# Altium PCB PCB1.PcbDoc
Units mm, origin at the board's own origin, x right, y up, seen from the top; angles counter-clockwise.
Board outline 30 x 30 mm, 2 copper layers (Top Layer, Bottom Layer), stack 1.571 mm thick; 12 components, 9 nets, 54 pads, 18 vias.
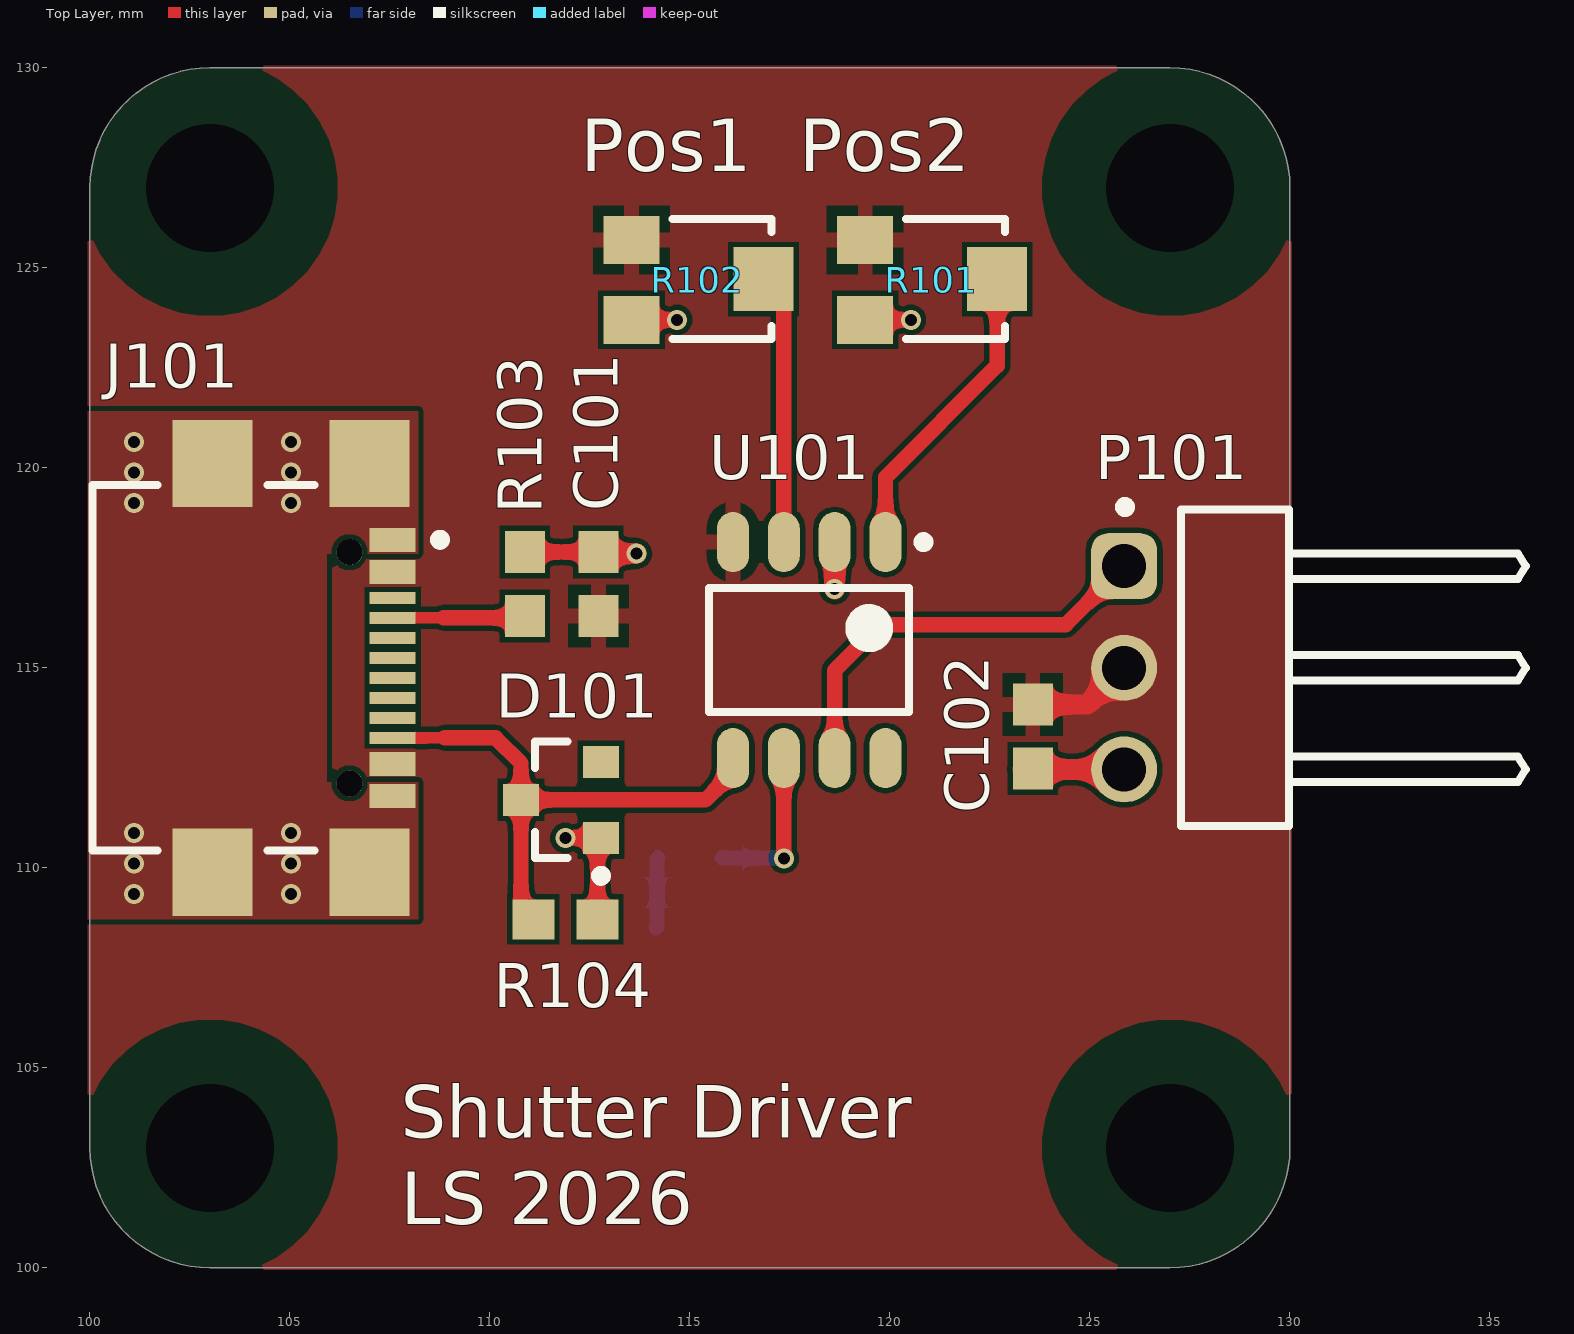
[diagram p0: Top Layer view]
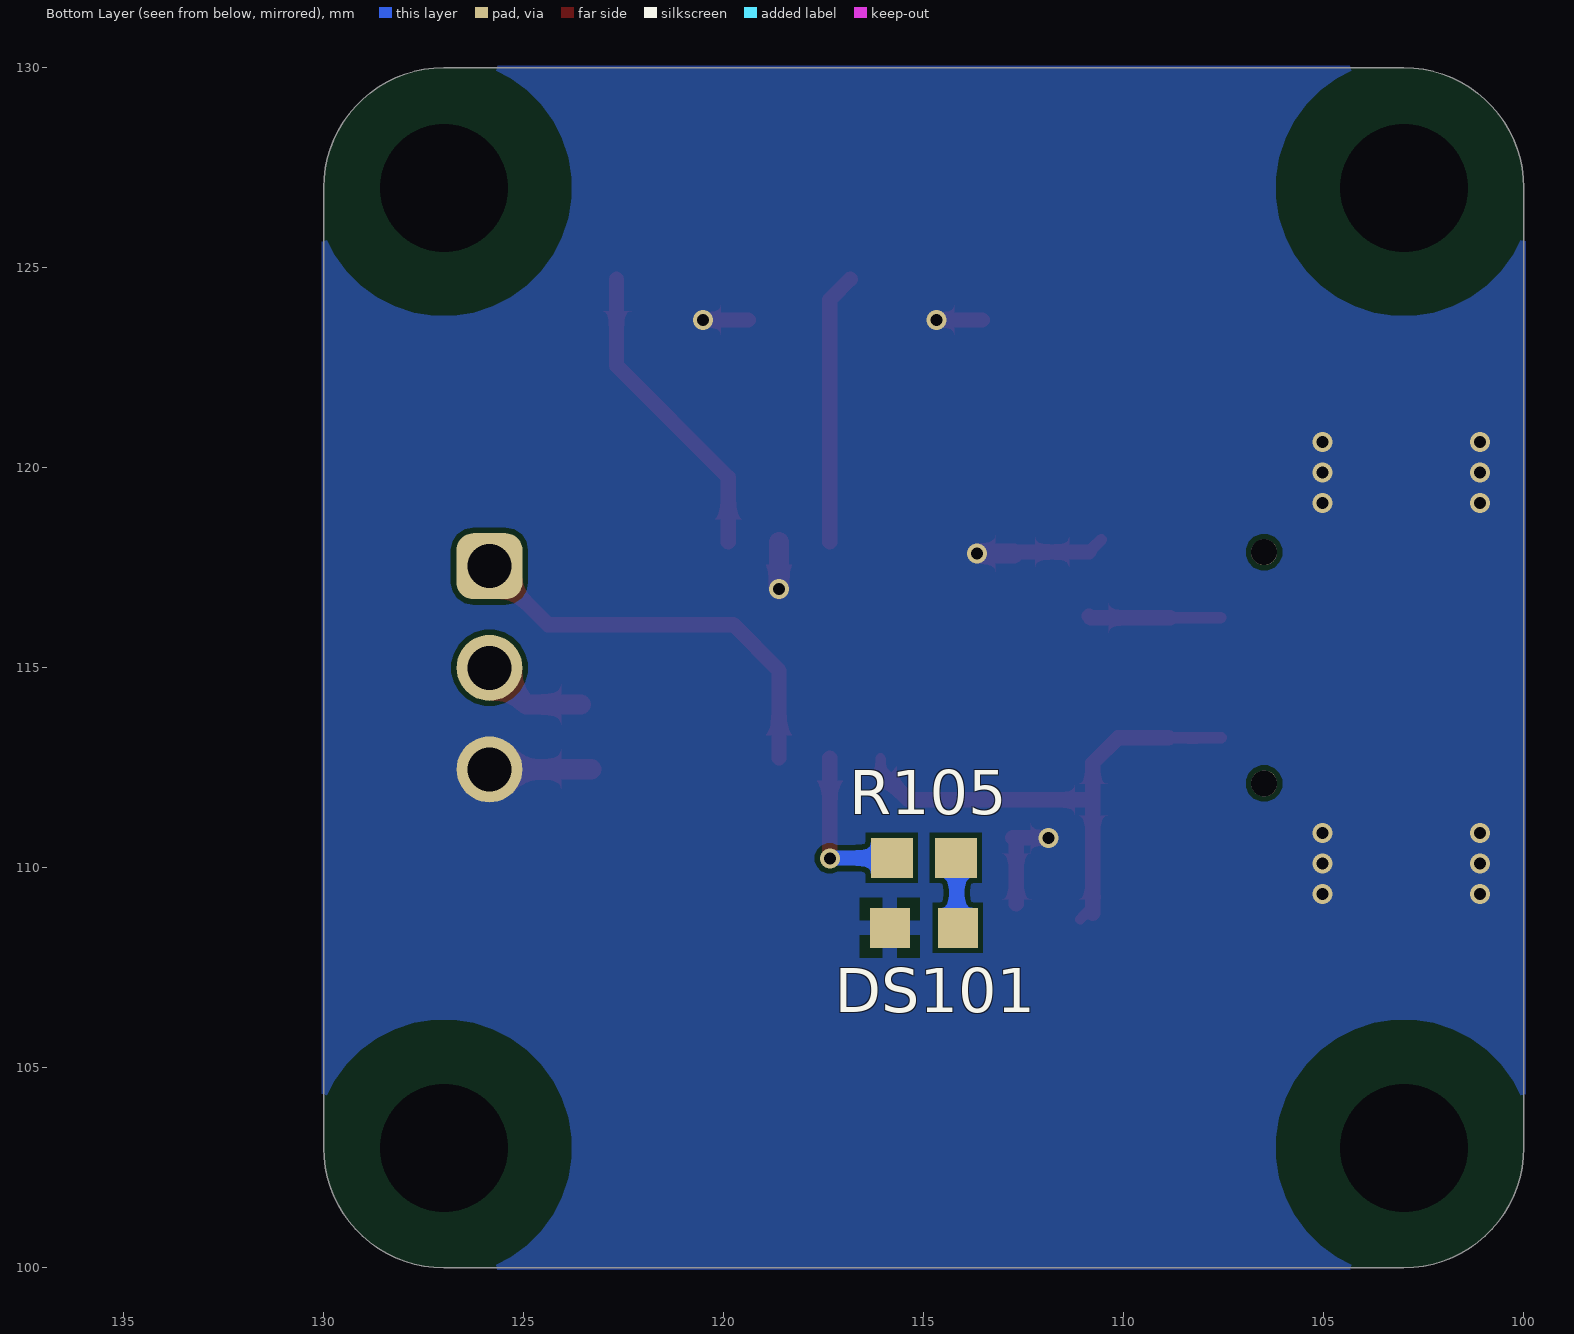
[diagram p1: Bottom Layer view, seen from below]
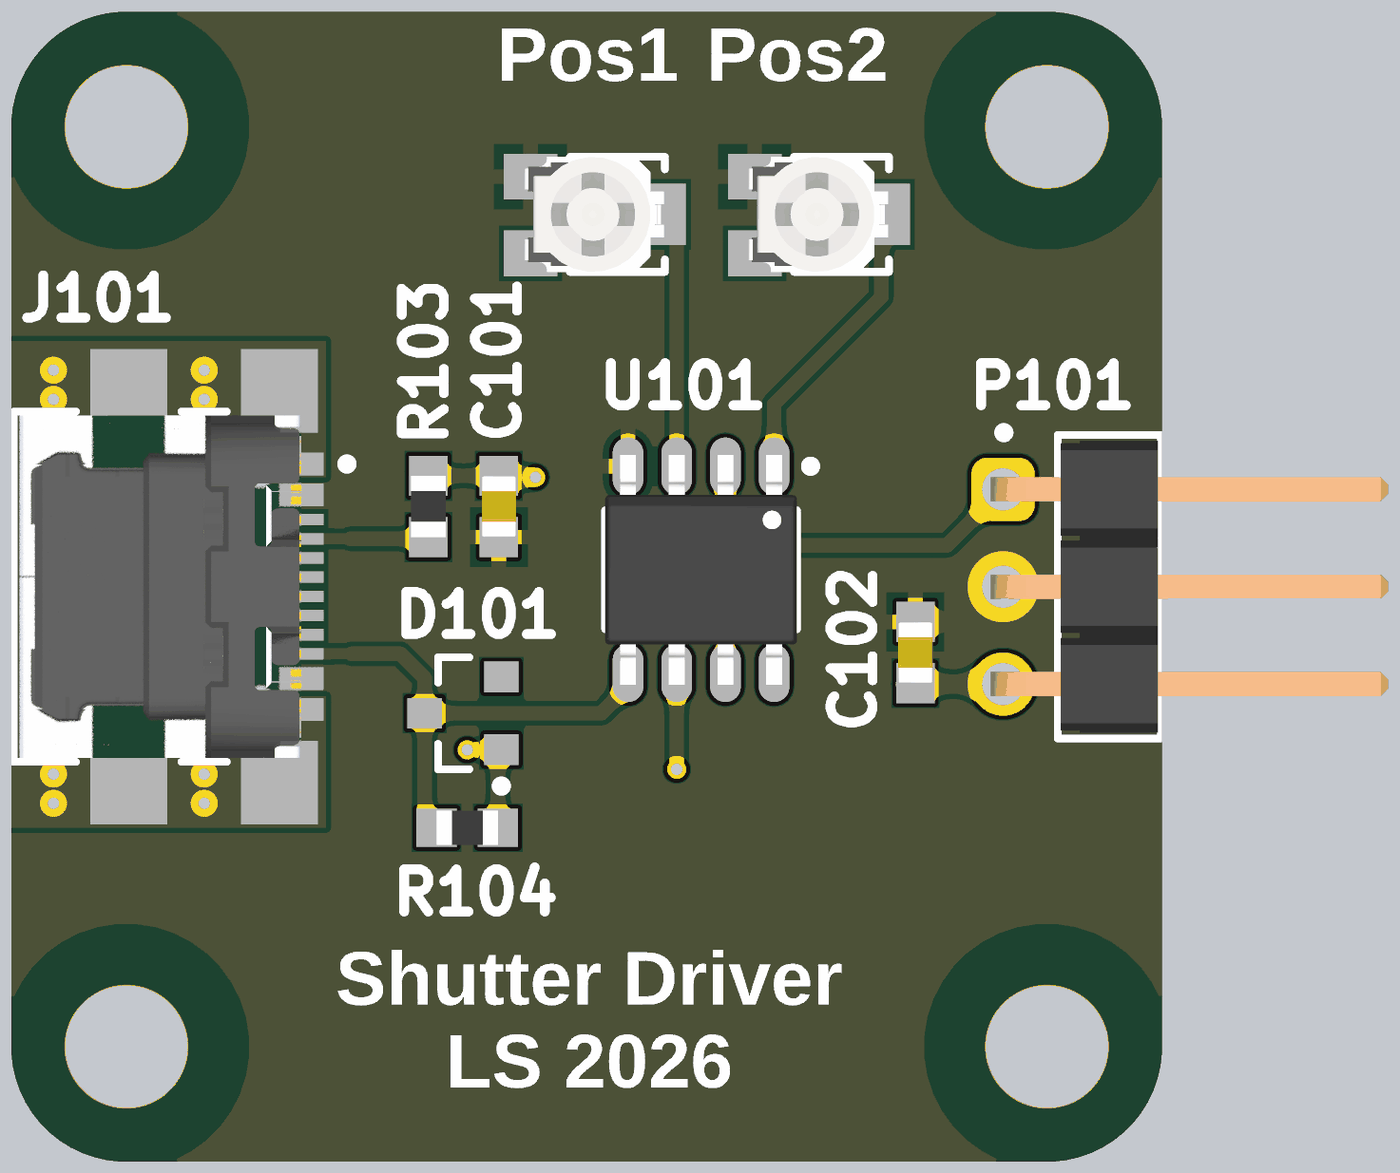
[diagram p2: 3D render of the assembled board from above, using the file's embedded part models]

## Layer stack, top to bottom
Top Solder: solder mask 0.0102, Solder Resist, Dk 3.5
Top Layer: signal copper 0.0356
Dielectric 1: dielectric 1.5, FR-4, Dk 4.8
Bottom Layer: signal copper 0.0356
Bottom Solder: solder mask 0.0102, Solder Resist, Dk 3.5

## Board outline
103,100 cw(c103,103) 100,103 100,127 cw(c103,127) 103,130 127,130 cw(c127,127) 130,127 130,103 cw(c127,103) 127,100

## Design rules (kind name [scope] priority, off if disabled: settings)
Clearance Clearance_MountingHole [All vs InUnion(2)] p1: gap=1.6 ignorepadtopadclearanceinfootprint=TRUE
Clearance [All] p2: gap=0.127 ignorepadtopadclearanceinfootprint=TRUE except(0.254: THPad-THPad THPad-Via Via-Via)
HoleSize [All] p1: absolutevalues=TRUE maxlimit=254 minlimit=0.025 maxpercent=80.000 minpercent=20.000
MinimumSolderMaskSliver [All] p1: minsoldermaskwidth=0.1
PolygonConnect PolygonConnect_Connectors [All vs InComponent('J101') or InComponent('P101') or IsVia] p1: connectstyle=Direct reliefconductorwidth=0.254 reliefentries=4 polygonreliefangle="90 Angle" airgapwidth=0.254
PolygonConnect [All] p2: connectstyle=Relief reliefconductorwidth=0.381 reliefentries=4 polygonreliefangle="90 Angle" airgapwidth=0.254
RoutingVias [All] p1: holewidth=0.3 width=0.5 viastyle="Through Hole" minholewidth=0.3 minwidth=0.5 maxholewidth=2539.975 maxwidth=2539.975
SilkToSilkClearance [All] p1: silktosilkclearance=0
SilkToSolderMaskClearance [IsPad] p1: minsilkscreentomaskgap=0.1 clearancetoexposedcopper=TRUE
SolderMaskExpansion SolderMaskExpansion_VIA [IsVia] p1: expansion=-100 istentingtop=FALSE
SolderMaskExpansion [All] p2: expansion=0.102 istentingtop=FALSE
SupplyNets "Schematic Supply Nets_1" [InNet('+5')] p1: voltage=0.000
SupplyNets "Schematic Supply Nets" [InNet('GND')] p2: voltage=0.000
Width [All] p1: maxlimit=254 minlimit=0.127 preferedwidth=0.254
26 further rules are at their usual default settings.

## Components (designator, comment, footprint, x,y, rotation, side; value= is the part's Value field where it differs from the comment)
C101 "Capacitor" CAPC1608X09N 112.712,117.094 r270 top value=1p
C102 "Capacitor" CAPC1608X09N 123.571,113.284 r90 top value=1p
D101 "BZX84C5V6LT1G" ONSC-SOT-23-3-318-08_V 111.776,111.699 r180 top
DS101 "KP-1608SECK" KING-0603LED_ORANGE_V 115,108.5 r180 bottom
J101 "USB4110-GF-A" FP-USB4110-GF-A-MFG 103.886,115 r270 top locked
P101 "61300311021" 61300311021 128.627,115 r90 top
R101 "Cermet Trimmer" CERMET_TRIMMER_SMD 121.031,124.714 r0 top
R102 "Cermet Trimmer" CERMET_TRIMMER_SMD 115.189,124.714 r0 top
R103 "5k1" RESC1608X06N 110.871,117.094 r270 top
R104 "5k1" RESC1608X06N 111.887,108.712 r180 top
R105 "1k" RESC1608X06N 115,110.25 r0 bottom
U101 "CH32V003J4M6" SOIC127P600X155-8N 117.983,115.443 r270 top

## Footprints (in the part's own frame and the unit in brackets; to place one, negate y for a bottom-side part, rotate by r counter-clockwise, add the part's x,y. Pads: shape width x height; smd on the part's side, far side on the other; paste and mask are expansions set on the pad)
61300311021 [mm] "Pin Header, pitch 2.54 mm, THT, Angled, single row, 3p"
  rrect50% 1.65x1.65 hole 1.1: 1(2.54,2.77)
  round 1.65 hole 1.1: 2(0,2.77) 3(-2.54,2.77)
  silkscreen extent -3.96,-7.27 4.14,2.87, body extent -3.81,-7.27 3.81,3.09, height 2.58
CAPC1608X09N [mm] "Chip Capacitor, 2-Leads, Body 1,55x0,85mm, IPC Medium Density"
  rect 1.05x1 smd: 1(-0.8,0) 2(0.8,0)
  body extent -0.8,-0.45 0.8,0.45, height 0.9
CERMET_TRIMMER_SMD [mm]
  rect 1.4x1.2 smd paste+0 mask+0: 1(-1.651,0.984) 3(-1.651,-1.016)
  rect 1.5x1.6 smd paste+0 mask+0: 2(1.65,0)
  silkscreen extent -0.63,-1.5 1.85,1.5, body extent -2.3,-1.7 2.5,1.7, height 0.25
FP-USB4110-GF-A-MFG [mm]
  rect 2.18x2 smd paste+0 mask+0: 1(-5.11,3.105) 2(5.11,3.105) 3(-5.11,-0.825) 4(5.11,-0.825)
  rect 0.6x1.15 smd paste+0 mask+0: A1-B12(-3.2,3.68) A4-B9(-2.4,3.68) B1-A12(3.2,3.68) B4-A9(2.4,3.68)
  rect 0.3x1.15 smd paste+0 mask+0: A5(-1.25,3.68) A6(-0.25,3.68) A7(0.25,3.68) A8(1.25,3.68) B5(1.75,3.68) B6(0.75,3.68) B7(-0.75,3.68) B8(-1.75,3.68)
  round 0.65 hole 0.65 unplated paste-2539.97 mask+0: ""(-2.89,2.605) ""(2.89,2.605)
  silkscreen extent -4.57,-3.83 4.57,4.99, body extent -6.3,-3.92 6.3,4.36, height 0.25
KING-0603LED_ORANGE_V [mm] "SMT LED, 2-Leads, Body 1.6x0.8mm (0603-Size)"
  rect 1x1 smd paste+0 mask+0: 1(0.85,0) 2(-0.85,0)
  body extent -0.92,-0.53 1.09,0.53, height 1.1
ONSC-SOT-23-3-318-08_V [mm] "SOT23, 3-Leads, Body 2.92x1.3mm, Pitch 0.95mm"
  rect 0.9x0.8 smd: 1(-1,0.95) 2(-1,-0.95) 3(1,0)
  silkscreen extent -1.13,-1.46 0.65,2.02, body extent -0.65,-1.46 0.65,1.46, height 1.11
RESC1608X06N [mm] "Chip Resistor, 2-Leads, Body 1,55x0,85mm, IPC Medium Density"
  rect 1.05x1 smd: 1(-0.8,0) 2(0.8,0)
  body extent -0.8,-0.45 0.8,0.45, height 0.6
SOIC127P600X155-8N [mm] "SOIC, 8-Leads, Body 5,00x3,90mm, Pitch 1,27mm, IPC Medium Density"
  oval 1.5x0.8 smd: 1(-2.7,1.905) 2(-2.7,0.635) 3(-2.7,-0.635) 4(-2.7,-1.905) 5(2.7,-1.905) 6(2.7,-0.635) 7(2.7,0.635) 8(2.7,1.905)
  silkscreen extent -2.82,-2.5 1.55,2.98, body extent -3,-2.5 3,2.5, height 1.55

## Part data
C101 C102: library part C0603
D101: library part CMP-1060-00974-1, "Zener Voltage Regulator, 225 mW, 3-Pin SOT-23, Pb-Free, Tape and Reel", Manufacturer="On Semiconductor", ComponentLink1Description="Manufacturer URL", ComponentLink1URL=http://www.onsemi.com/, ComponentLink2Description=Datasheet, ComponentLink2URL=http://www.onsemi.com/pub_link/Collateral/BZX84C2V4LT1-D.PDF, ComponentLink3Description="Package Specification", ComponentLink3URL=http://www.onsemi.cn/pub_link/Collateral/318-08.PDF, DatasheetVersion="Rev. 17", Mounting Technology="Surface Mount", PackageDescription="3-Pin Small Outline Transistor, Body 2.92 x 1.3 mm, Pitch 0.95 mm", PackageReference=SOT-23-3-318-08, PackageVersion="Rev. AP, 11/2009", Packing="Tape and Reel", PartNumber=BZX84C5V6LT1G, RoHS=Pb-Free
DS101: library part "LED Orange", "LED, SMT, 0603(1608), 1.1mm thickness, Orange", Forward Current="30 mA", Manufacturer=Kingbright, Power Dissipation="75 mW", Reverse Voltage="5 V", Storage Temperature="-40 to +85 degC", ComponentLink1Description="Manufacturer URL", ComponentLink1URL=http://www.kingbright.com/, ComponentLink2Description=Datasheet, ComponentLink2URL=http://www.kingbright.com/manager/upload/pdf/(1366274642)KP-1608SECK(Ver.14A).pdf, Mounting Technology="Surface Mount", PackageDescription="2-Pin SMT LED, 1.6 x 0.8 mm Pitch", PackageReference=0603LED_ORANGE, Packing Type="2000 pcs / reel", PartNumber=KP-1608SECK
J101: library part CMP-245163-000002-1, "CONN USB 2.0 TYPE-C R/A SMT", Current Rating=3/4.25/1.25/0.25A, Manufacturer=GCT, Package=0, Temperature="-40°C to +85°C", Temperature Range High=+85°C, Temperature Range Low=-40°C, Voltage Rating=20V, Automotive=No, Category=Conn, ComponentLink2Description=Datasheet, ComponentLink2URL=https://gct.co/files/drawings/usb4110.pdf, Conn Orientation="Right Angle", Contact Material=Gold,Nickel, Device Class L1=Connectors, Device Class L2="USB Connectors", Device Class L3=unset, Digikey Description="CONN USB 2.0 TYPE-C R/A SMT", Height=3.46mm, Is Female=yes, Lead Free=Yes, Manufacturer Part Number=USB4110-GF-A, Number Of Contacts=16, Octopart=https://octopart.com/usb4110-gf-a-gct-103941985, RoHS=TRUE, Shielding=true, Standoff Height=0.1mm, Usb Standard="USB 2.0"
P101: library part CMP-1502-01061-4, "THT Angled Pin Header WR-PHD, Pitch 2.54 mm, Single Row, 3 pins", Color=Black, Contact Resistance=20mΩ, Current Rating=3A, Operating Supply Voltage=250V, Connector Type="Male Pin", Contact Material=Copper, Contact Mating Length=5.9944mm, Contact Plating=Gold, Gender=Male, Lead Pitch=2.54mm, Mount="Through Hole", Number Of Contacts=3, Number of Pins=3, Number of Positions=3, Number of Rows=1, Packaging=Bulk, Pitch=2.54mm, RoHS=Compliant, Termination=Solder
R101 R102: library part Trimmer_SMD, "SMD Trimmer Resistor", Manufacturer=Bourns, Manufacturer Part Number=3250W-1-100, Package=3250W, Power Rating=1W, Temperature="-65°C to +150°C", Temperature Coefficient=50ppm/°C, Temperature Range High=+150°C, Temperature Range Low=-65°C, Tolerance=5%, Automotive=No, Category=Res, ComponentLink2Description=Datasheet, ComponentLink2URL=https://www.bourns.com/docs/Product-Datasheets/3250.pdf, Composition=Wirewound, Device Class L1="Passive Components", Device Class L2=Resistors, Device Class L3="Variable Resistors and Potentiometers", Digikey Description="TRIMMER 10 OHM 1W PC PIN TOP ADJ", Height=14.09mm, Lead Free=Yes, Mouser Description="Trimmer Resistors - Through Hole 10 OHMS 5% Square Sealed", Octopart=https://octopart.com/3250w-1-100-bourns-973860, RoHS=TRUE, Series="Trimpot 3250 - Sealed"
R103 R104 R105: library part R0603, "Resistor"
U101: "CH32V003 series is an industrial-grade general-purpose microcontroller designed based on QingKe RISC-V2A / core, which supports 48MHz system main frequency in the product function"

## Free pads (board coordinates)
  round 0 hole 3.2: 6(103,127) 7(127,127) 8(103,103) 9(127,103)

## Via types
v1: diameter 0.5, hole 0.3, Top Layer to Bottom Layer, 18 vias

## Nets (pads, with @x,y where several pads share a name; then routed paths per layer and width w, separated by ;. In a path a pad name is that pad's centre, name@x,y a point inside that pad or via, vN(x,y) a via of type N, cw(c..) or ccw(c..) an arc to the next point about the centre after c; other vN are vias at no path point)
+5: C101.2 C102.2 J101.A4-B9 J101.B4-A9 P101.2 R101.1 R102.1 U101.4 | length 2.7
  Top Layer w0.508: C102.2 124.941,114.084 P101.2
CC1: J101.A5 R103.2 | length 3.3
  Top Layer w0.28: J101.A5 108.839,116.25
  Top Layer w0.381: 108.839,116.25 110.827,116.25 R103.2
CC2: D101.3 J101.B5 R104.2 U101.5 | length 13.6
  Top Layer w0.254: R104.2@110.776,109.023 R104.2 ; U101.5@116.078,112.393 U101.5
  Top Layer w0.29: J101.B5 108.873,113.25
  Top Layer w0.381: 108.873,113.25 110.143,113.25 110.776,112.617 D101.3 ; R104.2@110.776,108.858 D101.3 ; U101.5@116.078,112.393 115.384,111.699 D101.3
GND: C101.1 C102.1 D101.1 DS101.2 J101.1 J101.2 J101.3 J101.4 J101.A1-B12 J101.B1-A12 P101.3 R101.3 R102.3 R103.1 R104.1 U101.2 | length 11.8
  Top Layer w0.28: R103.1@110.565,118.2 R103.1 ; v1(111.887,110.744) v1@111.892,110.749 ; C101.1 C101.1@112.75,117.856
  Top Layer w0.381: R103.1 C101.1 ; v1@111.892,110.749 D101.1 ; R104.1@112.687,109.093 D101.1@112.687,110.744 ; R102.3 v1(114.681,123.698) ; R101.3 v1(120.523,123.698)
  Top Layer w0.508: C101.1@112.75,117.856 v1(113.665,117.856) ; v1(118.618,116.967) U101.2 ; C102.1@123.313,112.46 P101.3
  other v1: 101.099,109.35 105.029,109.35 101.099,110.112 105.029,110.112 101.099,110.874 105.029,110.874 101.099,119.126 105.029,119.126 101.099,119.888 105.029,119.888 101.099,120.65 105.029,120.65
NetDS101_1: DS101.1 R105.1 | length 1.8
  Bottom Layer w0.381: DS101.1 114.175,108.525 114.175,110.225 R105.1
NetP101_1: P101.1 U101.7 | length 10.5
  Top Layer w0.381: U101.7 118.618,114.935 119.761,116.078 124.395,116.078 P101.1
NetR105_2: R105.2 U101.6 | length 4.1
  Top Layer w0.381: v1(117.348,110.236) U101.6
  Bottom Layer w0.381: R105.2 115.807,110.243 117.341,110.243 v1(117.348,110.236)
POS1: R101.2 U101.1 | length 7.7
  Top Layer w0.381: U101.1 119.888,119.761 122.681,122.554 R101.2
POS2: R102.2 U101.3 | length 6.8
  Top Layer w0.381: R102.2 117.348,124.205 U101.3
pads on no net: D101.2 J101. J101.A6 J101.A7 J101.A8 J101.B6 J101.B7 J101.B8 U101.8

## Polygon pours and split planes (outlines as drawn)
+5 on Top Layer "+5_L01_P002" (solid, pour order 2): 102.87,130.048 101.6,129.794 100.584,128.905 99.949,127.508 99.949,102.87 100.076,101.981 100.584,100.965 101.346,100.33 102.743,99.949 127.254,99.949 128.016,100.076 128.651,100.457 129.413,101.092 129.921,102.108 130.048,102.87 130.048,127 129.921,128.016 129.413,128.905 128.905,129.413 127.762,130.048
+5 on Top Layer "+5_L01_P003" (solid, pour order 3): 108.204,117.856 108.204,116.967 106.934,116.967 106.934,113.03 108.204,113.03 108.204,112.141 105.918,112.141 105.918,117.856
GND on Top Layer "GND_L01_P000" (solid, pour order 0): 99.949,121.412 108.204,121.412 108.204,117.856 105.918,117.856 105.918,112.141 108.204,112.141 108.204,108.712 99.949,108.712
GND on Bottom Layer "GND_L02_P001" (solid, pour order 1): 102.87,130.048 101.6,129.794 100.584,128.905 99.949,127.508 99.949,102.87 100.076,101.981 100.584,100.965 101.346,100.33 102.743,99.949 127.254,99.949 128.016,100.076 128.651,100.457 129.413,101.092 129.921,102.108 130.048,102.87 130.048,127 129.921,128.016 129.413,128.905 128.905,129.413 127.762,130.048

## Silkscreen, mask and mechanical layers (free items; w line width, h text height)
Top Overlay:
  text "Pos1" at 112.268,126.973 h2.25
  text "Pos2" at 117.729,126.973 h2.25
  text "Shutter Driver" at 107.765,102.815 h2.25
  text "LS 2026" at 107.765,100.656 h2.25
Mechanical 1:
  the board outline again, w0.2